# Altium PCB PyBoard_PCB.PcbDoc
Units mm, origin at the board's own origin, x right, y up, seen from the top; angles counter-clockwise.
Board outline 83.01 x 31.52 mm, 2 copper layers (Top Layer, Bottom Layer); 60 components, 72 nets, 227 pads, 19 vias.
Unrouted connection lines stored in the file: 17.
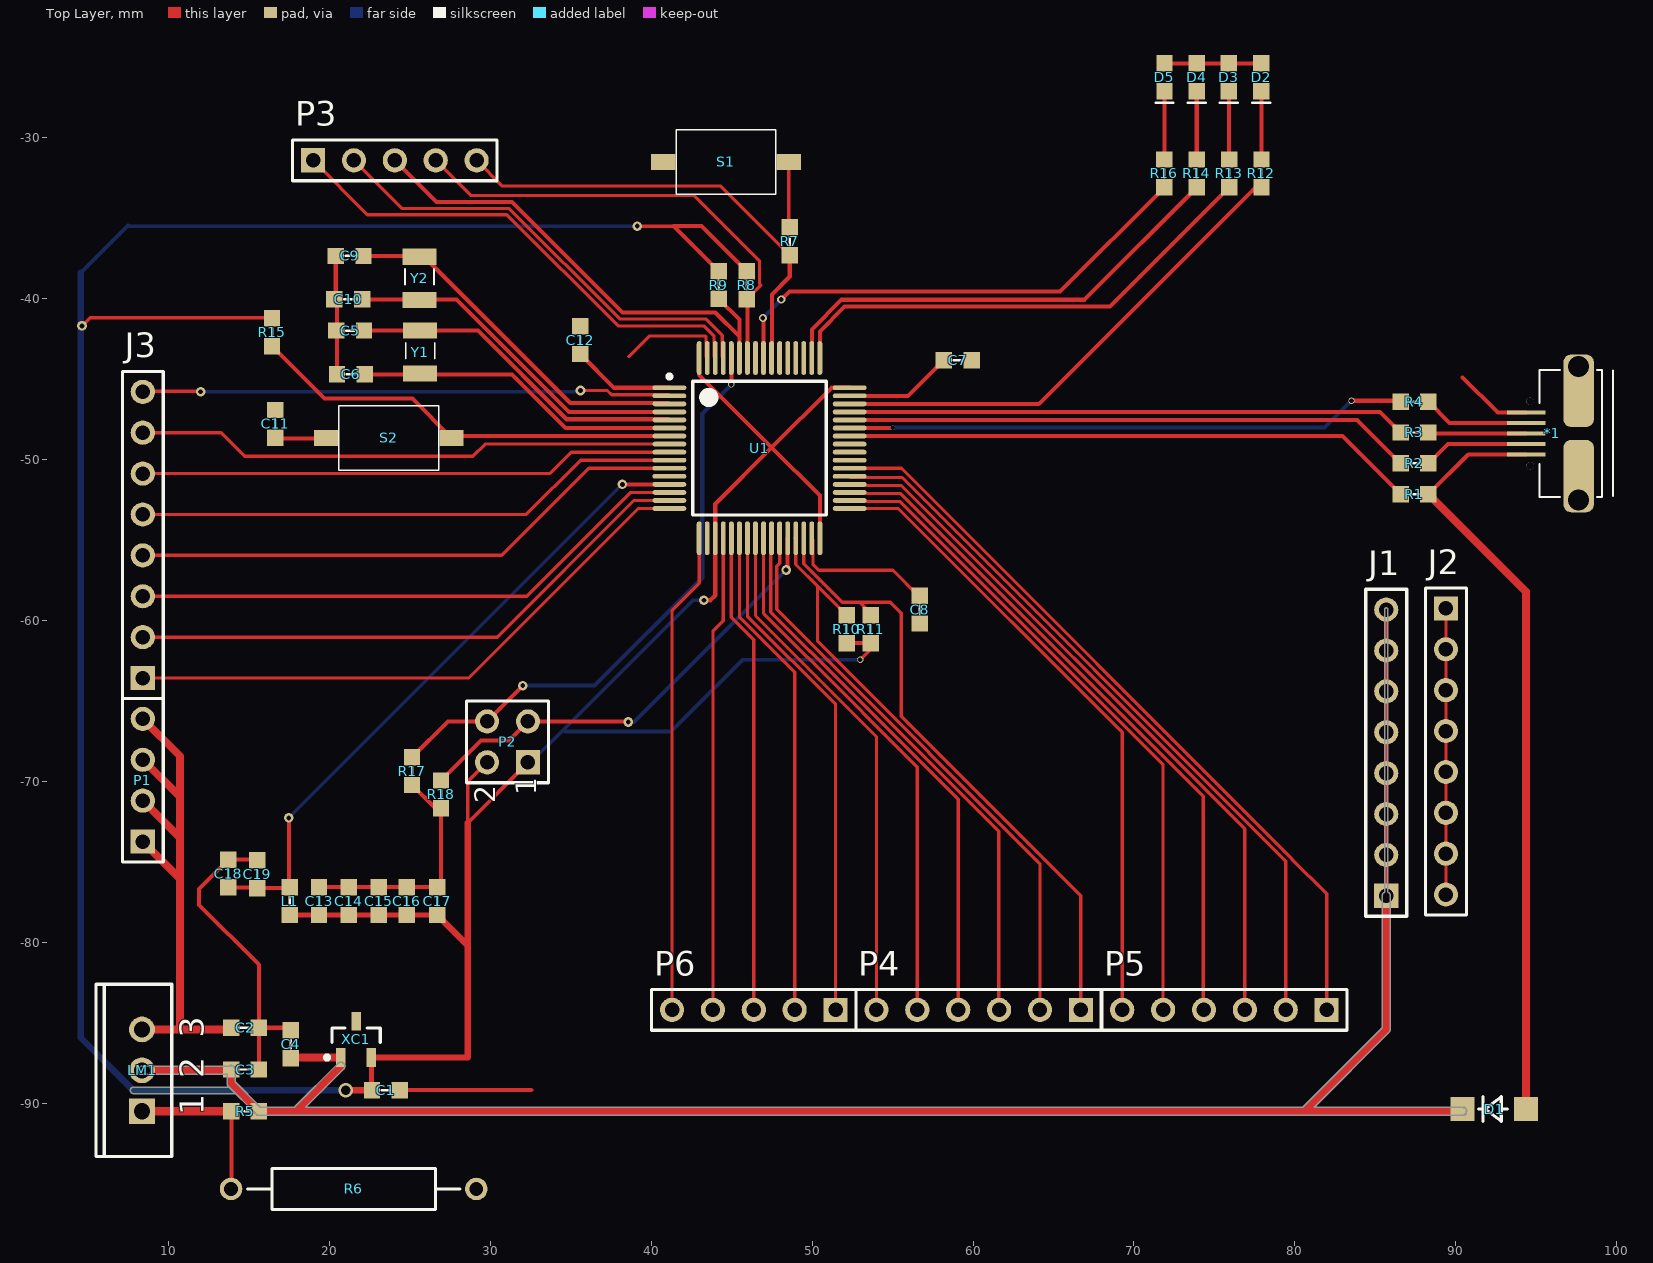
[diagram p0: Top Layer view]
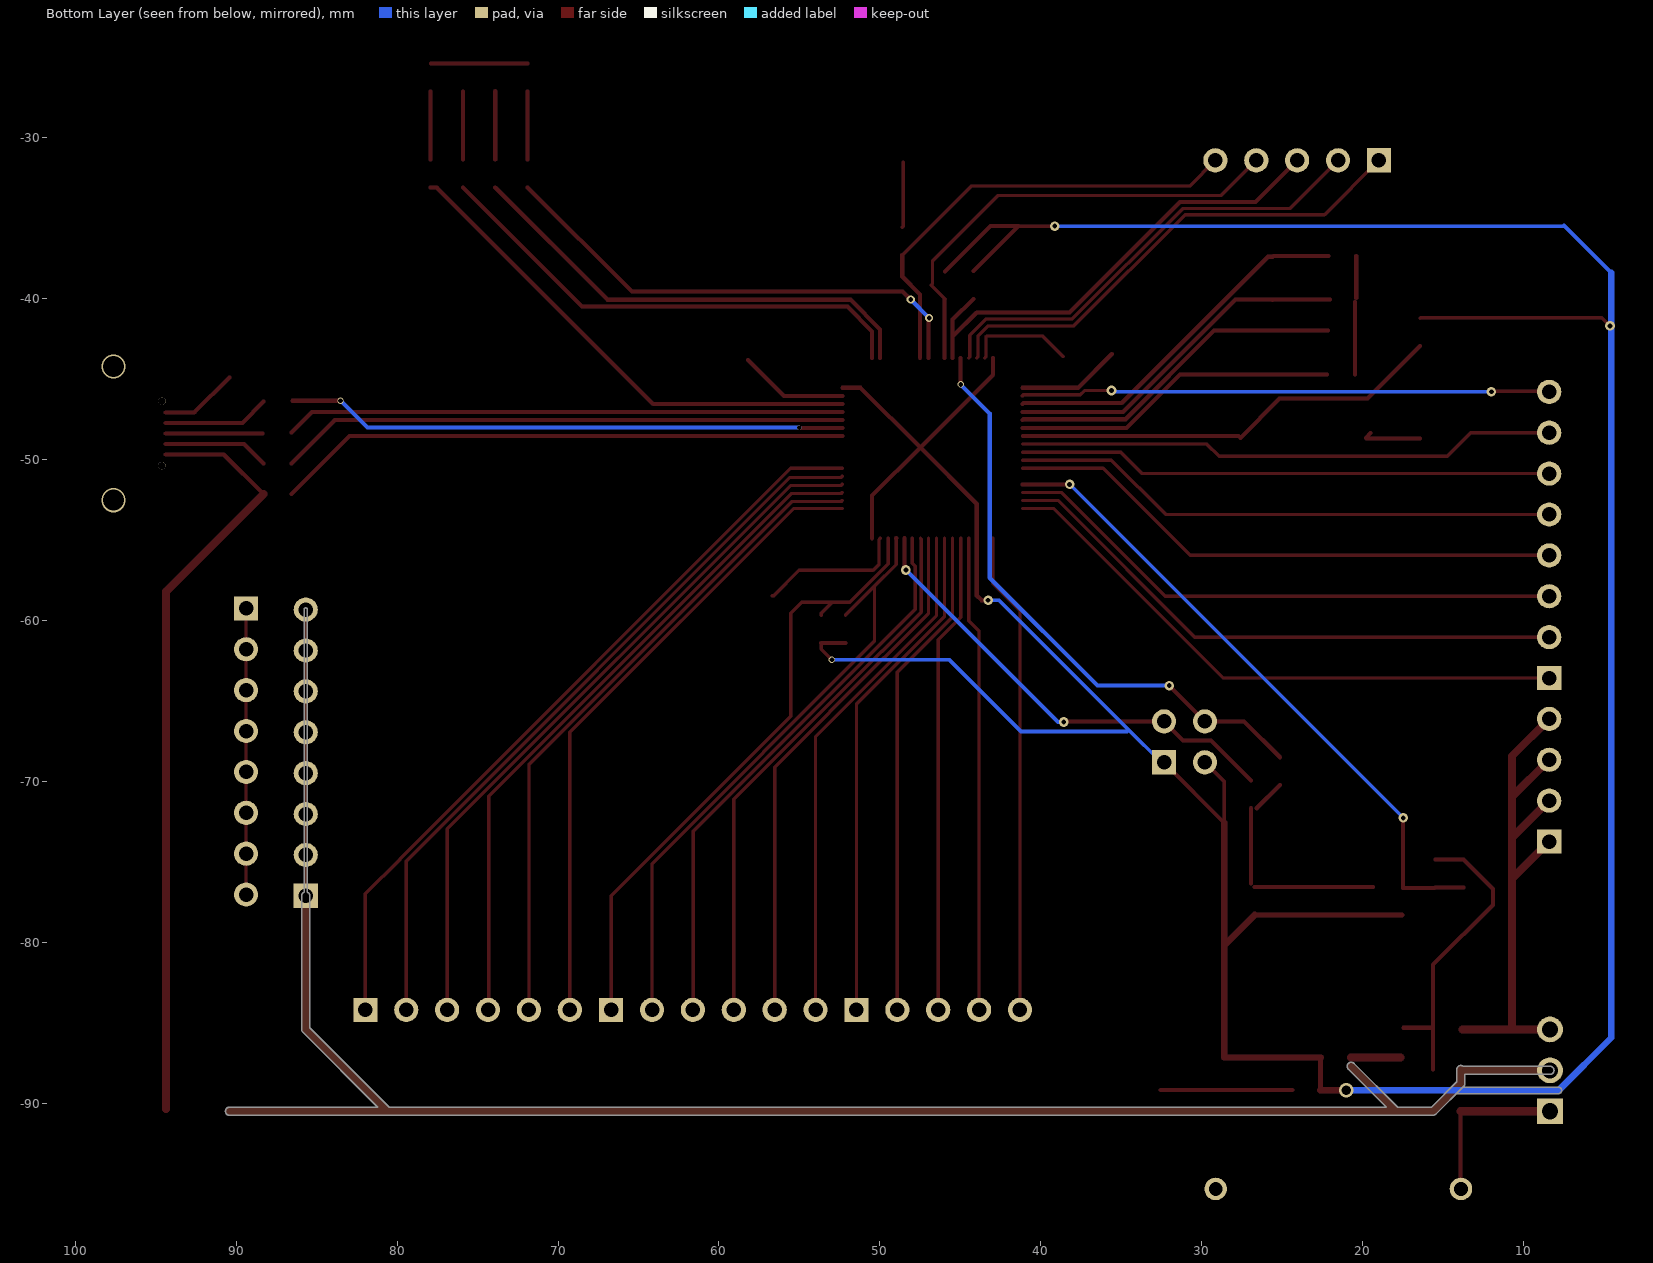
[diagram p1: Bottom Layer view, seen from below]

## Layer stack, top to bottom
Top Layer: signal copper 0.0356
Dielectric: dielectric 0.32, FR-4, Dk 4.8
Bottom Layer: signal copper 0.0356

## Board outline
7.707,-89.321 ccw(c7.849,-89.179) 7.849,-89.38 14.188,-89.38 13.731,-88.923 15.459,-90.651 cw(c15.636,-90.474) 15.459,-90.651 ccw(c15.636,-90.474) 15.636,-90.724 90.413,-90.724 ccw(c90.413,-90.474) 90.663,-90.474 ccw(c90.413,-90.474) 90.413,-90.223 81.199,-90.223 85.851,-85.571 cw(c85.674,-85.394) 85.851,-85.571 ccw(c85.674,-85.394) 85.925,-85.394 85.925,-77.089 ccw(c85.674,-77.089) 85.776,-76.86 85.776,-59.309 ccw(c85.674,-59.309) 85.572,-59.309 85.572,-76.86 ccw(c85.674,-77.089) 85.424,-77.089 85.424,-85.29 80.49,-90.223 18.537,-90.223 20.899,-87.861 ccw(c20.722,-87.684) 20.973,-87.684 ccw(c20.722,-87.684) 20.545,-87.507 17.829,-90.223 15.74,-90.223 14.159,-88.643 14.159,-87.88 ccw(c13.909,-87.88) 13.755,-87.682 8.372,-87.682 ccw(c8.372,-87.933) 8.372,-88.183 13.658,-88.183 13.658,-88.747 ccw(c13.909,-88.747) 13.732,-88.924 cw(c13.909,-88.747) 13.731,-88.923 13.787,-88.979 7.849,-88.979 ccw(c7.849,-89.179)

## Design rules (kind name [scope] priority, off if disabled: settings)
Clearance [All] p1: gap=0.178
PolygonConnect [All] p1: connectstyle=Relief reliefconductorwidth=0.254 reliefentries=4 polygonreliefangle="90 Angle"
RoutingVias [All] p1: holewidth=0.711 width=1.27 viastyle="Through Hole" minholewidth=0.711 minwidth=1.27 maxholewidth=0.711 maxwidth=1.27
SilkscreenOverComponentPads [IsPad] p1: minsilkscreentomaskgap=0.254
SolderMaskExpansion [All] p1: expansion=0.102
TestPointUsage [All] p1: valid=0 allowmultiple=FALSE
Testpoint [All] p1: side=3 testpointundercomponent=TRUE minsize=1.016 maxsize=2.54 preferedsize=1.524 minholesize=0 maxholesize=1.016 preferedholesize=0.813 testpointgrid=0.025 style=297 order=0123456789
Width [All] p1: maxlimit=0.508 minlimit=0.178 preferedwidth=0.203
23 further rules are at their usual default settings.

## Components (designator, comment, footprint, x,y, rotation, side; value= is the part's Value field where it differs from the comment)
*1 "MicroUSB" MicroUSB 99.771,-48.362 r0 top
C1 "2u2" SMD0603 23.522,-89.163 r180 top
C2 "0.1u" SMD0603 14.772,-85.287 r180 top
C3 "1u" SMD0603 14.772,-87.88 r180 top
C4 "2u2" SMD0603 17.622,-86.309 r270 top
C5 "2.2p" SMD0603 21.3,-41.97 r180 top
C6 "2.2p" SMD0603 21.35,-44.695 r180 top
C7 "2u2" SMD0603 59.05,-43.809 r180 top
C8 "2u2" SMD0603 56.695,-59.311 r90 top
C9 "2.2p" SMD0603 21.274,-37.335 r0 top
C10 "2.2p" SMD0603 21.184,-40.035 r0 top
C11 "104" SMD0603 16.65,-47.773 r270 top
C12 "105" SMD0603 35.6,-42.568 r270 top
C13 "104" SMD0603 19.37,-77.416 r270 top
C14 "104" SMD0603 21.22,-77.416 r270 top
C15 "104" SMD0603 23.07,-77.416 r270 top
C16 "104" SMD0603 24.82,-77.416 r270 top
C17 "104" SMD0603 26.72,-77.416 r270 top
C18 "22u" SMD0603 13.733,-75.703 r90 top
C19 "104" SMD0603 15.533,-75.75 r90 top
D1 "Diode" "SS24 - small" 94.35,-90.338 r180 top
D2 "LED RED" LED0603 77.9,-26.238 r90 top
D3 "LED GREEN" LED0603 75.899,-26.238 r90 top
D4 "LED Yellow" LED0603 73.897,-26.238 r90 top
D5 "LED Blue" LED0603 71.896,-26.238 r90 top
J1 "Header 8-5V" HDR1X8 85.674,-77.089 r90 top
J2 "Header 8-GND" HDR1X8 89.383,-59.233 r270 top
J3 "Header 8-Y1Y8" HDR1X8 8.422,-63.558 r90 top
L1 "1uH" SMD0603 17.555,-77.416 r90 top
LM1 "LM317" TO-220AB 8.372,-87.933 r90 top
P1 "Header 4_7.4V" HDR1X4 8.422,-73.718 r90 top
P2 "Header 2X2" HDR2X2 32.35,-68.795 r90 top
P3 "Header 5" HDR1X5 18.999,-31.394 r0 top
P4 "Header 6" HDR1X6 66.7,-84.176 r180 top
P5 "Header 6" HDR1X6 81.97,-84.176 r180 top
P6 "Header 5" HDR1X5 51.461,-84.176 r180 top
R1 "560" SMD0603 87.429,-52.138 r0 top
R2 "22" SMD0603 87.429,-50.221 r0 top
R3 "22" SMD0603 87.429,-48.304 r0 top
R4 "560" SMD0603 87.429,-46.388 r0 top
R5 "240" SMD0603 14.772,-90.474 r0 top
R6 "Res Adj2" AXIAL-0.6 21.522,-95.301 r180 top
R7 "10K" SMD0603 48.616,-36.424 r270 top
R8 "4K7" SMD0603 45.95,-39.152 r270 top
R9 "4K7" SMD0603 44.2,-39.141 r270 top
R10 "4K7" SMD0603 52.146,-60.53 r90 top
R11 "4K7" SMD0603 53.646,-60.53 r90 top
R12 "560" SMD0603 77.922,-32.212 r270 top
R13 "560" SMD0603 75.912,-32.212 r270 top
R14 "560" SMD0603 73.901,-32.212 r270 top
R15 "10K" SMD0603 16.45,-42.079 r90 top
R16 "560" SMD0603 71.89,-32.212 r270 top
R17 "10K" SMD0603 25.15,-69.344 r270 top
R18 "10K" SMD0603 26.95,-70.786 r270 top
S1 "USER" "SW 3X6" 44.653,-31.496 r180 top
S2 "SW-PB" "SW 3X6" 23.703,-48.639 r180 top
U1 "STM32F405RGT6" LQFP64_M 46.736,-49.276 r0 top
XC1 "XC6206" SOT-23_N 21.672,-86.01 r90 top
Y1 "8M" TXC_9H03200019 25.65,-43.226 r270 top
Y2 "32K" TXC_9H03200019 25.614,-38.635 r270 top

## Footprints (in the part's own frame and the unit in brackets; to place one, negate y for a bottom-side part, rotate by r counter-clockwise, add the part's x,y. Pads: shape width x height; smd on the part's side, far side on the other; paste and mask are expansions set on the pad)
AXIAL-0.6 [mm] "Variable Resistor; 2 Leads"
  round 1.4 hole 0.85: 1(-7.62,0) 2(7.62,0)
  silkscreen extent -6.6,-1.27 6.6,1.27
HDR1X4 [mm] "Connector; Header; 4 Position"
  rect 1.5x1.5 hole 0.9: 1(0,0)
  round 1.5 hole 0.9: 2(2.54,0) 3(5.08,0) 4(7.62,0)
  silkscreen extent -1.27,-1.27 8.89,1.27
HDR1X5 [mm] "Connector; Header; 5 Position"
  rect 1.5x1.5 hole 0.9: 1(0,0)
  round 1.5 hole 0.9: 2(2.54,0) 3(5.08,0) 4(7.62,0) 5(10.16,0)
  silkscreen extent -1.27,-1.27 11.43,1.27
HDR1X6 [mm] "Connector; Header; 6 Position"
  rect 1.5x1.5 hole 0.9: 1(0,0)
  round 1.5 hole 0.9: 2(2.54,0) 3(5.08,0) 4(7.62,0) 5(10.16,0) 6(12.7,0)
  silkscreen extent -1.27,-1.27 13.97,1.27
HDR1X8 [mm] "Connector; Header; 8 Position"
  rect 1.5x1.5 hole 0.9: 1(0,0)
  round 1.5 hole 0.9: 2(2.54,0) 3(5.08,0) 4(7.62,0) 5(10.16,0) 6(12.7,0) 7(15.24,0) 8(17.78,0)
  silkscreen extent -1.27,-1.27 19.05,1.27
HDR2X2 [mm] "Connector; Header; 2x2 Position"
  rect 1.5x1.5 hole 0.9: 1(0,0)
  round 1.5 hole 0.9: 2(0,2.54) 3(2.54,0) 4(2.54,2.54)
  silkscreen extent -1.27,-1.27 3.81,3.81
LED0603 [mil]
  rect 40x40 smd: 1(-34,0) 2(34,0)
  silkscreen extent -62,-22 -62,22
LQFP64_M [mm] "Thin QFP, 64-Leads, Body 10x10mm, Pitch 0.5mm, IPC Low Density"
  oval 2.1x0.3 smd: 1(-5.6,3.75) 2(-5.6,3.25) 3(-5.6,2.75) 4(-5.6,2.25) 5(-5.6,1.75) 6(-5.6,1.25) 7(-5.6,0.75) 8(-5.6,0.25) 9(-5.6,-0.25) 10(-5.6,-0.75) 11(-5.6,-1.25) 12(-5.6,-1.75) 13(-5.6,-2.25) 14(-5.6,-2.75) 15(-5.6,-3.25) 16(-5.6,-3.75) 33(5.6,-3.75) 34(5.6,-3.25) 35(5.6,-2.75) 36(5.6,-2.25) 37(5.6,-1.75) 38(5.6,-1.25) 39(5.6,-0.75) 40(5.6,-0.25) 41(5.6,0.25) 42(5.6,0.75) 43(5.6,1.25) 44(5.6,1.75) 45(5.6,2.25) 46(5.6,2.75) 47(5.6,3.25) 48(5.6,3.75)
  oval 0.3x2.1 smd: 17(-3.75,-5.6) 18(-3.25,-5.6) 19(-2.75,-5.6) 20(-2.25,-5.6) 21(-1.75,-5.6) 22(-1.25,-5.6) 23(-0.75,-5.6) 24(-0.25,-5.6) 25(0.25,-5.6) 26(0.75,-5.6) 27(1.25,-5.6) 28(1.75,-5.6) 29(2.25,-5.6) 30(2.75,-5.6) 31(3.25,-5.6) 32(3.75,-5.6) 49(3.75,5.6) 50(3.25,5.6) 51(2.75,5.6) 52(2.25,5.6) 53(1.75,5.6) 54(1.25,5.6) 55(0.75,5.6) 56(0.25,5.6) 57(-0.25,5.6) 58(-0.75,5.6) 59(-1.25,5.6) 60(-1.75,5.6) 61(-2.25,5.6) 62(-2.75,5.6) 63(-3.25,5.6) 64(-3.75,5.6)
  silkscreen extent -5.72,-4.15 4.15,4.57, body extent -5,-5 5,5, height 1.6
MicroUSB [mm]
  rect 2.4x0.25 smd: 1(-5.4,-1.3) 2(-5.4,-0.65) 3(-5.4,0) 4(-5.4,0.65) 5(-5.4,1.3)
  rrect50% 1.9x4.5 smd: 6(-2.15,2.65) 7(-2.15,-2.65)
  round 0.457 hole 0.457 unplated: ""(-5.159,-2) ""(-5.159,2)
  silkscreen extent -4.57,-3.94 0,3.94
SMD0603 [mil]
  rect 40x40 smd: 1(-34,0) 2(34,0)
  silkscreen extent -10,0 10,0
SOT-23_N [mm] "SOT23, 3-Leads, Body 2.9x1.3mm, Pitch 0.95mm, Lead Span 2.5mm, IPC Medium Density"
  rect 1.15x0.6 smd: 1(-1.125,0.95) 2(-1.125,-0.95) 3(1.125,0)
  silkscreen extent -1.25,-1.5 0.7,1.92, body extent -0.7,-1.5 0.7,1.5, height 1.1
"SS24 - small" [mm]
  rect 1.5x1.5 smd: 1(0,0) 2(3.937,0)
  silkscreen extent 1.14,-0.76 2.92,0.76, body extent -0.64,-0.89 4.57,0.89, height 3
"SW 3X6" [mm]
  rect 1.5x1 smd: 1(-3.9,0) 2(3.9,0)
  silkscreen extent -3.1,-2 3.1,2
TO-220AB [mm] "TO, Thru-Hole, Vertical, Heatsink Mounted; 3 In-Line Leads; Pitch 2.54 mm"
  rect 1.6x1.6 hole 1: 1(-2.54,0)
  round 1.6 hole 1: 2(0,0) 3(2.54,0)
  silkscreen extent -5.35,-1.85 5.35,2.85
TXC_9H03200019 [mm]
  rect 1x2.1 smd: 1(-1.25,0) 2(1.425,0)
  silkscreen extent -0.5,-0.9 0.5,0.9, body extent -1.73,-0.85 1.73,0.85, height 0.8

## Part data
C1 C2 C3 C4 C5 C6 C7 C8 C9 C10 C11 C12 C13 C14 C15 C16 C17 C18 C19: library part Cap, "Capacitor"
D1: "Default Diode"
D2: library part LED-RED, "红色发光二极管"
D3: library part LED-GREEN, "绿色发光二极管"
D4: library part LED-YELLOW, "黄色发光二极管"
D5: library part LED-BLUE, "蓝色发光二极管"
J1 J2 J3: library part "Header 8", "Header, 8-Pin"
L1: library part Inductor, "Inductor"
P1: library part "Header 4", "Header, 4-Pin"
P2: "Header, 2-Pin, Dual row"
P3 P6: "Header, 5-Pin"
P4 P5: "Header, 6-Pin"
R1 R2 R3 R4 R5 R7 R8 R9 R10 R11 R12 R13 R14 R15 R16 R17 R18: library part Res, "Resistor"
R6: "Variable Resistor"
S1: library part SW-PB, "Switch"
S2: "Switch"
U1: "ARM Cortex-M4 32-bit MCU+FPU, 210 DMIPS, 1024 kB Flash, 192 kB Internal RAM, 51 I/Os, 64-pin LQFP, -40 to 85 degC, Tray"
Y1 Y2: library part XTAL, "Crystal Oscillator"

## Via types
v1: diameter 0.6, hole 0.3, Top Layer to Bottom Layer, 9 vias
v2: diameter 0.4, hole 0.3, Top Layer to Bottom Layer, 3 vias
v3: diameter 1.5, hole 1.3, Top Layer to Bottom Layer, 2 vias
v4: diameter 0.5, hole 0.3, Top Layer to Bottom Layer, 2 vias
v5: diameter 0.3, hole 0.26, Top Layer to Bottom Layer, 1 vias
v6: diameter 0.6/0.6 (per signal layer), hole 0.3, Top Layer to Bottom Layer, 1 vias
v7: diameter 0.9, hole 0.6, Top Layer to Bottom Layer, 1 vias

## Nets (pads, with @x,y where several pads share a name; then routed paths per layer and width w, separated by ;. In a path a pad name is that pad's centre, name@x,y a point inside that pad or via, vN(x,y) a via of type N, cw(c..) or ccw(c..) an arc to the next point about the centre after c; other vN are vias at no path point)
3V3: C1.2 C13.2 C14.2 C15.2 C16.2 C17.2 L1.1 P2.1 P2.2 R8.1 R9.1 R10.1 R11.1 R15.2 U1.19 U1.32 U1.48 U1.64 XC1.2 | length 241
  Top Layer w0.203: v1(4.648,-41.681) 5.156,-41.173 16.408,-41.173 R15.2 ; v1(39.141,-35.484) 41.406,-35.484 41.427,-35.505 ; R10.1@52.123,-61.417 R10.1 ; v2(52.984,-62.42) 53.646,-61.758 R11.1
  Top Layer w0.24: P2.2 28.613,-69.991 28.613,-72.555 P2.1@32.35,-68.818
  Top Layer w0.25: 41.406,-35.484 43.145,-35.484 R8.1 ; 41.427,-35.505 R9.1
  Top Layer w0.254: U1.64 42.986,-44.719 47.495,-49.228 ; v1(43.282,-58.725) 43.681,-58.725 43.986,-58.42 U1.19 43.986,-52.737 47.495,-49.228 ; U1.32 50.486,-52.219 47.495,-49.228 ; R10.1 R11.1 ; U1.48 51.197,-45.526 47.495,-49.228
  Top Layer w0.3: L1.1 C17.2 ; C1.2@22.622,-89.127 XC1.2
  Top Layer w0.4: v7@21.047,-89.163 C1.2 ; XC1.2 28.613,-87.135 28.613,-80.172 ; C17.2 28.613,-80.172 ; 28.613,-72.555 28.613,-80.172
  Bottom Layer w0.203: 7.544,-35.484 v1(39.141,-35.484)
  Bottom Layer w0.24: P2.1 32.526,-68.795 34.544,-66.777 ; v1(43.282,-58.725) 42.596,-58.725 34.544,-66.777 ; v2(52.984,-62.42) 45.708,-62.42 41.236,-66.892 34.659,-66.892 34.544,-66.777
  Bottom Layer w0.25: 4.572,-38.379 7.506,-35.446
  Bottom Layer w0.4: 4.572,-38.379 4.572,-85.903 7.849,-89.179 v7(21.031,-89.179)
5V: C3.2 C4.2 D1.2 J1.1 J1.2 J1.3 J1.4 J1.5 J1.6 J1.7 J1.8 LM1.2 R5.2 XC1.1 | length 123.9
  Top Layer w0.203: C4.2 C4.2@17.659,-87.135 ; J1.1 J1.2 J1.3 J1.4 J1.5 J1.6 J1.7 J1.8
  Top Layer w0.5: LM1.2 C3.2@13.856,-87.933 ; C3.2 13.909,-88.747 R5.2 17.932,-90.474 ; C4.2@17.659,-87.135 XC1.1 ; XC1.1@20.722,-87.684 17.932,-90.474 ; J1.1 85.674,-85.394 80.594,-90.474 ; D1.2@90.413,-90.474 80.594,-90.474 ; 17.932,-90.474 80.594,-90.474
BOOT0: P2.4 R17.1 U1.60 | length 37
  Top Layer w0.254: R17.1 27.376,-66.255 P2.4 ; P2.4 v1(32.029,-64.033) ; v2(44.983,-45.314) U1.60@44.983,-43.679
  Bottom Layer w0.254: v1(32.029,-64.033) 36.474,-64.033 43.18,-57.328 43.18,-47.117 v2(44.983,-45.314)
GND: *1.5 *1.6 *1.7 C1.1 C2.1 C3.1 C4.1 C5.2 C6.2 C7.1 C8.1 C9.1 C10.1 C11.1 C12.1 C13.1 C14.1 C15.1 C16.1 C17.1 C18.2 C19.2 D2.2 D3.2 D4.2 D5.2 J2.1 J2.2 J2.3 J2.4 J2.5 J2.6 J2.7 J2.8 R6.1 R17.2 R18.2 S1.2 U1.12 U1.18 U1.63 XC1.3 | length 83.6
  Top Layer w0.203: 38.608,-43.586 39.878,-42.316 43.378,-42.316 43.415,-42.354 43.415,-43.605 U1.63 ; J2.8 J2.7 J2.6 J2.5 J2.4 J2.3 J2.2 J2.1
  Top Layer w0.254: C19.2@15.487,-74.84 C18.2 11.913,-76.66 11.913,-77.648 15.636,-81.371 C2.1 ; C3.1 C2.1 ; C4.1@17.464,-85.287 C2.1 ; C13.1 C17.1 ; C10.1@20.41,-39.946 C9.1 ; C6.2 C10.1@20.486,-40.201 ; C1.1 32.554,-89.163 ; R17.2 R18.2@26.592,-71.65 ; C17.1@26.95,-76.322 R18.2 ; D5.2 D2.2 ; 90.424,-44.882 92.604,-47.062 *1.5
  other v3: 97.612,-52.512 97.612,-44.212
Net*1_2: *1.2 R2.2 | length 6.6
  Top Layer w0.254: R2.2 89.502,-49.012 *1.2
Net*1_3: *1.3 R3.2 | length 6
  Top Layer w0.254: R3.2@88.35,-48.362 *1.3
Net*1_4: *1.4 R4.2 | length 6.6
  Top Layer w0.254: R4.2 89.616,-47.712 *1.4
NetC5_1: C5.1 U1.5 Y1.1 | length 21.3
  Top Layer w0.254: C5.1 Y1.1@25.644,-41.97 ; Y1.1 29.252,-41.976 34.756,-47.481 41.091,-47.481 U1.5
NetC6_1: C6.1 U1.6 Y1.2 | length 20.2
  Top Layer w0.254: C6.1 Y1.2@25.606,-44.695 ; Y1.2@25.694,-44.695 31.36,-44.695 34.691,-48.026 U1.6
NetC7_2: C7.2 U1.47 | length 6.8
  Top Layer w0.254: U1.47 55.97,-46.026 C7.2
NetC8_2: C8.2 U1.31 | length 9.1
  Top Layer w0.203: U1.31 50.057,-54.947 50.057,-56.5 50.427,-56.871 55.029,-56.871 56.606,-58.448 C8.2
NetC9_2: C9.2 U1.3 Y2.1 | length 22.7
  Top Layer w0.254: C9.2 Y2.1@25.564,-37.335 ; Y2.1 25.882,-37.385 34.978,-46.481 41.091,-46.481 U1.3
NetC10_2: C10.2 U1.4 Y2.2 | length 22
  Top Layer w0.254: C10.2 Y2.2@25.589,-40.035 ; Y2.2 Y2.2@25.589,-40.035 ; U1.4 34.912,-47.026 27.922,-40.035 Y2.2@25.589,-40.035
NetC11_2: C11.2 S2.2 | length 3.7
  Top Layer w0.254: C11.2@16.453,-48.667 S2.2@19.774,-48.667 ; S2.2@19.513,-48.348 S2.2
NetC18_1: C18.1 C19.1 L1.2 U1.13 | length 40.3
  Top Layer w0.254: C18.1 C19.1@15.487,-76.567 ; C19.1 17.494,-76.613 v1(17.494,-72.249) ; v1(38.216,-51.526) U1.13
  Bottom Layer w0.203: v1(17.494,-72.249) v1(38.216,-51.526)
NetD2_1: D2.1 R12.1 | length 4.2
  Top Layer w0.254: R12.1 D2.1@77.922,-27.124
NetD3_1: D3.1 R13.1 | length 4.2
  Top Layer w0.254: R13.1 D3.1@75.912,-27.115
NetD4_1: D4.1 R14.1 | length 4.2
  Top Layer w0.254: R14.1 D4.1@73.901,-27.105
NetD5_1: D5.1 R16.1 | length 4.2
  Top Layer w0.254: R16.1 D5.1@71.89,-27.107
NetLM1_1: LM1.1 R5.1 R6.2 | length 10.4
  Top Layer w0.254: R6.2@13.931,-95.272 R5.1@13.931,-90.473
  Top Layer w0.5: LM1.1 R5.1@13.931,-90.473
NetR7_1: R7.1 S1.1 | length 4.1
  Top Layer w0.203: S1.1 48.553,-35.498 R7.1
NetR15_1: R15.1 S2.1 U1.7 | length 26.9
  Top Layer w0.254: R15.1 19.71,-46.203 25.167,-46.203 S2.1 ; S2.1@27.727,-48.514 U1.7@41.124,-48.514
PA0_X1: J3.3 U1.14 | length 35.4
  Top Layer w0.203: J3.3 32.276,-58.478 38.728,-52.026 U1.14
PA1_X2: J3.2 U1.15 | length 36.2
  Top Layer w0.203: J3.2 30.447,-61.018 38.939,-52.526 U1.15
PA2_X3: J3.1 U1.16 | length 37.1
  Top Layer w0.203: J3.1 28.669,-63.558 39.201,-53.026 U1.16
PA3_X4: P6.5 U1.17 | length 30
  Top Layer w0.203: P6.5 41.301,-59.342 42.986,-57.657 U1.17
PA4_X5: P6.4 U1.20 | length 29.6
  Top Layer w0.203: P6.4 43.841,-60.655 44.486,-60.01 U1.20
PA5_X6: P6.3 U1.21 | length 29.9
  Top Layer w0.203: U1.21 44.986,-59.794 46.38,-61.189 P6.3
PA6_X7: P6.2 U1.22 | length 30.7
  Top Layer w0.203: U1.22 45.486,-59.755 48.921,-63.19 P6.2
PA7_X8: P6.1 U1.23 | length 31.6
  Top Layer w0.203: U1.23 45.986,-59.717 51.461,-65.191 P6.1
PA8_SDIO_SW: U1.41
PA9_VSUB: R1.1 U1.42 | length 35.7
  Top Layer w0.254: U1.42 82.953,-48.526 R1.1
PA10_ID: R4.1 U1.43 | length 34.8
  Top Layer w0.254: U1.43 v5@54.996,-48.026 ; v2(83.515,-46.33) R4.1@86.507,-46.33
  Bottom Layer w0.254: v5(55.016,-48.006) 81.839,-48.006 v2(83.515,-46.33)
PA11_DM: R2.1 U1.44 | length 35.3
  Top Layer w0.254: U1.44 83.87,-47.526 R2.1
PA12_DP: R3.1 U1.45 | length 34.8
  Top Layer w0.254: U1.45 85.287,-47.026 R3.1
PA13_P5_RED: R12.2 U1.46 | length 31.2
  Top Layer w0.254: U1.46 64.086,-46.526 77.537,-33.075 R12.2
PA14_P4_GRN: R13.2 U1.49 | length 30.8
  Top Layer w0.254: U1.49 50.486,-42.022 52.02,-40.488 68.499,-40.488 R13.2
PA15_P3_YEL: R14.2 U1.50 | length 29.3
  Top Layer w0.254: U1.50 49.986,-41.911 51.841,-40.056 66.93,-40.056 73.901,-33.085 R14.2
PB0_Y11: P4.4 U1.26 | length 34.2
  Top Layer w0.203: U1.26 47.427,-54.935 47.427,-59.458 49.865,-61.897 49.888,-61.897 59.08,-71.089 P4.4
PB1_Y12: P4.3 U1.27 | length 35.1
  Top Layer w0.203: U1.27 47.986,-56.427 47.808,-56.605 47.808,-59.278 61.595,-73.065 61.595,-84.15 P4.3
PB2_BOOT1: P2.3 R18.1 U1.28 | length 28.7
  Top Layer w0.254: R18.1 29.436,-67.437 31.168,-67.437 P2.3 v1@38.543,-66.255 ; v6@48.486,-56.746 U1.28
  Bottom Layer w0.254: v1(38.583,-66.294) 38.938,-66.294 v6(48.387,-56.845)
PB3_X17_SW: P3.5 R7.2 U1.55 | length 28.7
  Top Layer w0.203: P3.5 30.759,-32.995 44.323,-32.995 R7.2
  Top Layer w0.254: U1.55@47.5,-43.662 47.5,-39.724 48.616,-38.608 R7.2
PB4_P2_BLUE: R16.2 U1.56 | length 30.7
  Top Layer w0.254: U1.56 v4@46.986,-41.246 ; v4(48.087,-40.051) 48.59,-39.548 65.418,-39.548 R16.2
  Bottom Layer w0.254: v4(46.939,-41.199) v4(48.087,-40.051)
PB5: U1.57
PB6_X9_SCL: P3.4 R8.2 U1.58 | length 29.1
  Top Layer w0.203: P3.4 28.804,-33.579 42.652,-33.579 46.737,-37.665 46.737,-39.079 46.812,-39.153 R8.2
  Top Layer w0.254: U1.58 R8.2@45.986,-40.052
PB7_X10_SDA: P3.3 R9.2 U1.59 | length 30.1
  Top Layer w0.254: P3.3 26.67,-33.985 31.365,-33.985 38.223,-40.843 43.987,-40.843 45.486,-42.342 ; R9.2 45.486,-41.291 45.486,-42.342 ; U1.59 45.486,-42.342
PB8_Y3: P3.2 U1.61 | length 28.8
  Top Layer w0.203: P3.2 24.536,-34.392 31.197,-34.392 38.055,-41.25 43.389,-41.25 44.415,-42.276 44.415,-43.605 U1.61
PB9_Y4: P3.1 U1.62 | length 30.8
  Top Layer w0.203: P3.1 22.377,-34.773 31.039,-34.773 37.948,-41.681 43.282,-41.681 43.915,-42.315 43.915,-43.605 U1.62
PB10_Y9_SCL: P4.2 R10.2 U1.29 | length 38.1
  Top Layer w0.203: U1.29 48.986,-56.507 50.343,-57.864 ; R10.2 50.343,-57.864 ; P4.2 64.16,-75.092 50.343,-61.274 50.343,-57.864
  Top Layer w0.254: U1.29 U1.29@48.992,-54.882
PB11_Y10_SDA: P4.1 R11.2 U1.30 | length 39.3
  Top Layer w0.203: U1.30 49.486,-56.468 51.87,-58.852 52.959,-58.852 ; R11.2 53.646,-59.539 52.959,-58.852 ; P4.1 66.7,-77.089 55.55,-65.938 55.55,-59.538 54.864,-58.852 52.959,-58.852
PB12_Y5: P5.6 U1.33 | length 39.9
  Top Layer w0.203: U1.33 55.363,-53.026 69.27,-66.933 P5.6
PB13_Y6: P5.5 U1.34 | length 41.5
  Top Layer w0.203: U1.34 52.407,-52.597 55.472,-52.597 71.81,-68.934 P5.5
PB14_Y7: P5.4 U1.35 | length 43.1
  Top Layer w0.203: U1.35 52.407,-52.097 55.511,-52.097 74.306,-70.891 74.306,-84.132 P5.4
PB15_Y8: P5.3 U1.36 | length 44.7
  Top Layer w0.203: U1.36 52.407,-51.597 55.55,-51.597 76.89,-72.937 P5.3
PC0_X19: J3.7 U1.8 | length 33.6
  Top Layer w0.203: J3.7 13.291,-48.318 14.757,-49.784 28.931,-49.784 29.689,-49.026 U1.8
PC1_X20: J3.6 U1.9 | length 33.3
  Top Layer w0.203: J3.6 33.699,-50.858 35.031,-49.526 U1.9
PC2_X21: J3.5 U1.10 | length 34.1
  Top Layer w0.203: J3.5 32.251,-53.398 35.623,-50.026 U1.10
PC3_X22: J3.4 U1.11 | length 35
  Top Layer w0.203: J3.4 30.727,-55.938 36.139,-50.526 U1.11
PC4_X11: P4.6 U1.24 | length 32.4
  Top Layer w0.203: U1.24 46.486,-59.678 54,-67.192 P4.6
PC5_X12: P4.5 U1.25 | length 33.3
  Top Layer w0.203: U1.25 46.986,-59.557 49.707,-62.278 49.73,-62.278 56.54,-69.088 P4.5
PC6_Y1: P5.2 U1.37 | length 46.2
  Top Layer w0.203: U1.37 52.407,-51.097 55.589,-51.097 79.43,-74.938 P5.2
PC7_Y2: P5.1 U1.38 | length 47.8
  Top Layer w0.203: U1.38 55.557,-50.526 79.811,-74.78 79.811,-74.807 81.97,-76.966 P5.1
PC8_SDIO_D0: U1.39
PC9_SDIO_D1: U1.40
PC10_SDIO_D2: U1.51
PC11_SDIO_D3: U1.52
PC12_SDIO_CK: U1.53
PC13_X18: J3.8 U1.2 | length 33
  Top Layer w0.203: J3.8 8.455,-45.745 11.989,-45.745 v1(12.014,-45.771) ; v1(35.611,-45.695) 37.288,-45.695 37.549,-45.955 41.102,-45.955 41.172,-46.026 U1.2
  Bottom Layer w0.203: v1(12.014,-45.771) 35.535,-45.771 v1(35.611,-45.695)
PD2: U1.54
VBAT: C12.2 U1.1 | length 6.4
  Top Layer w0.254: C12.2 37.694,-45.526 U1.1
VBUS: *1.1 D1.1 R1.2 | length 47.8
  Top Layer w0.254: R1.2 90.769,-49.662 *1.1
  Top Layer w0.5: R1.2 94.35,-58.195 D1.1
VIN: C2.2 LM1.3 P1.1 P1.2 P1.3 P1.4 | length 35.6
  Top Layer w0.5: LM1.3 10.744,-85.393 ; P1.1@8.422,-73.802 P1.1 10.744,-76.04 ; P1.2 10.744,-73.5 ; P1.3 10.744,-70.96 ; P1.4 10.744,-68.42 10.744,-70.96 ; C2.2@13.803,-85.393 10.744,-85.393 ; 10.744,-85.393 10.744,-76.04 ; 10.744,-76.04 10.744,-73.5 ; 10.744,-73.5 10.744,-70.96
pads on no net: *1.

## Silkscreen, mask and mechanical layers (free items; w line width, h text height)
Mechanical 1:
  lines w0.254: 99.568,-100 0,-100 0,-21.412 99.949,-21.412 ; 99.949,-21.184 100,-100

## Text inside footprints (layer, text, board x,y; h text height)
LM1: Top Overlay "3" at 12.197,-85.893 h1.5 r90; Top Overlay "1" at 12.197,-90.723 h1.5 r90; Top Overlay "2" at 12.197,-88.433 h1.5 r90
P2: Top Overlay "1" at 32.858,-70.827 h1.27 r90; Top Overlay "2" at 30.318,-71.335 h1.27 r90